# Altium PCB Supply Lines.PcbDoc (part 2 of 3)
Units mil, origin at the board's own origin, x right, y up, seen from the top; angles counter-clockwise.
Board outline 2300 x 4000 mil, 4 copper layers (Top Layer 1, GND, PWR, Bottom Layer 1), stack 23.712 mil thick; 27 components, 16 nets, 73 pads, 20 vias.
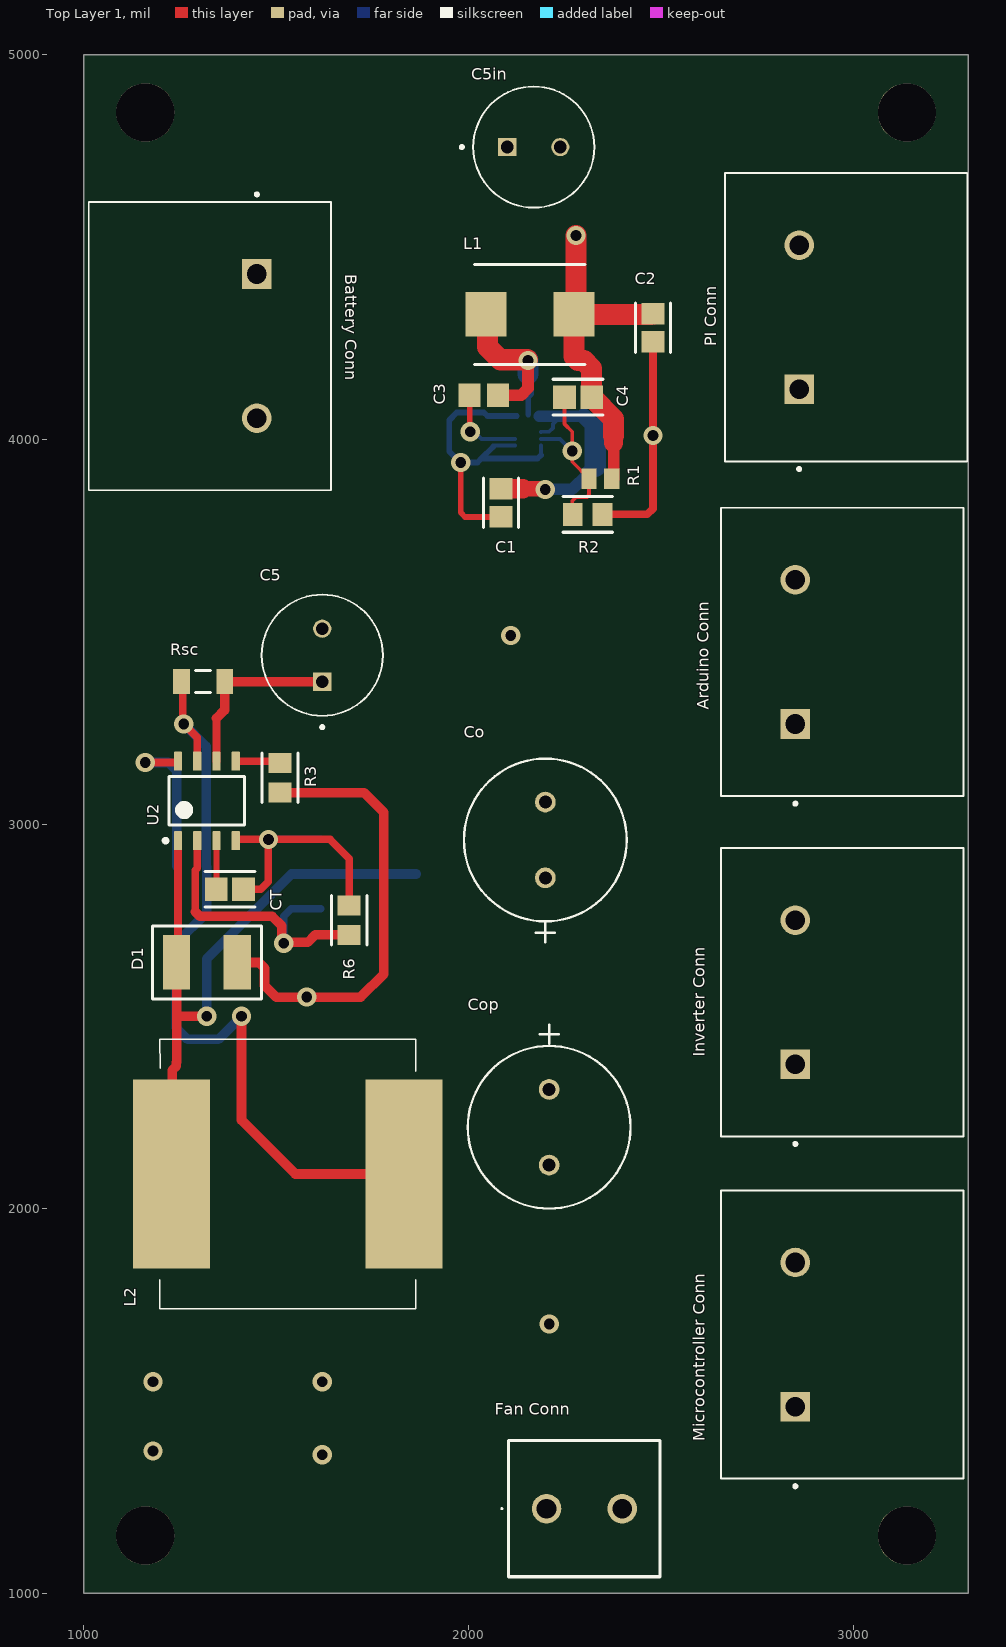
[diagram p0: Top Layer 1 view]

## Part data (continued)
L2: library part PA4344.823ANLT, "Inductor Power Shielded/Molded Wirewound 82uH 20% 100KHz 6.5A 0.083Ohm DCR T/R", DC Resistance (DCR)=83mΩ, Manufacturer="Pulse Electronics", Max Current Rating=6.5A, Max Operating Temperature=155°C, Min Operating Temperature=-55°C, Supplier Part Number=673-PA4344.823ANLT, Test Frequency=100kHz, Tolerance=20%, Category="Fixed Inductors", ComponentLink1Description=https://datasheet.octopart.com:443/PA4344.823ANLT-Pulse-datasheet-151605165.pdf?src-supplier=IHS, ComponentLink1URL=https://datasheet.octopart.com:443/PA4344.823ANLT-Pulse-datasheet-151605165.pdf?src-supplier=IHS, ComponentLink2Description=https://datasheet.octopart.com:443/PA4344.823ANLT-Pulse-datasheet-165545885.pdf?src-supplier=JRH+Electronics, ComponentLink2URL=https://datasheet.octopart.com:443/PA4344.823ANLT-Pulse-datasheet-165545885.pdf?src-supplier=JRH+Electronics, ComponentLink3Description=https://datasheet.octopart.com:443/PA4344.823ANLT-Pulse-Electronics-datasheet-184973453.pdf?src-supplier=Master+Electronics, ComponentLink3URL=https://datasheet.octopart.com:443/PA4344.823ANLT-Pulse-Electronics-datasheet-184973453.pdf?src-supplier=Master+Electronics, ComponentLink4Description=https://datasheet.octopart.com:443/PA4344.823ANLT-Pulse-datasheet-118084069.pdf?src-supplier=Sager+Electronics, ComponentLink4URL=https://datasheet.octopart.com:443/PA4344.823ANLT-Pulse-datasheet-118084069.pdf?src-supplier=Sager+Electronics, ComponentLink5Description=https://datasheet.octopart.com:443/PA4344.823ANLT-Pulse-datasheet-156002114.pdf?src-supplier=Future+Electronics, ComponentLink5URL=https://datasheet.octopart.com:443/PA4344.823ANLT-Pulse-datasheet-156002114.pdf?src-supplier=Future+Electronics, Country of Origin="Mainland China", Export Control Classification Number (ECCN) Code=EAR99, Harmonized Tariff Schedule (HTS) Code=8504.50.80.00, Height=6.7mm, Introduction Date=2017-09-08, Lifecycle Status=Production, Manufacturer Part Number=PA4344.823ANLT, Number of Circuits=1, Number of Terminals=2, Pricing="1=3.66, 10=3.01, 50=2.94, 100=2.34, 1000=2.27, 10000=2.27 (USD)", REACH SVHC=Yes, RoHS=Compliant, Shielding=Shielded, Stock=1073, Supplier=Mouser, Width=16.9mm
Q1: "60V 800mW 120@1A, 2V 6A NPN SOT-223 Bipolar Transistors - BJT ROHS", Case/Package=SOT-223-4, Collector Base Voltage (VCBO)=100V, Collector Emitter Breakdown Voltage=60V, Manufacturer=onsemi, Manufacturer Lifecycle Status=ACTIVE, Max Collector Current=6A, Max Operating Temperature=150°C, Max Power Dissipation=2W, Min Operating Temperature=-55°C, Supplier Part Number=863-NSV60601MZ4T3G, Transition Frequency=100MHz, Category=BJTs, China RoHS=Non-Compliant, Collector Emitter Voltage (VCEO)=60V, ComponentLink1Description=https://datasheet.octopart.com:443/NSV60601MZ4T3G-onsemi-datasheet-180967378.pdf?src-supplier=IHS, ComponentLink1URL=https://datasheet.octopart.com:443/NSV60601MZ4T3G-onsemi-datasheet-180967378.pdf?src-supplier=IHS, ComponentLink2Description=https://datasheet.octopart.com:443/NSV60601MZ4T3G-ON-Semiconductor-datasheet-12533590.pdf?src-supplier=Upverter, ComponentLink2URL=https://datasheet.octopart.com:443/NSV60601MZ4T3G-ON-Semiconductor-datasheet-12533590.pdf?src-supplier=Upverter, ComponentLink3Description=https://datasheet.octopart.com:443/NSV60601MZ4T3G-ON-Semiconductor-datasheet-606849.pdf?src-supplier=Upverter, ComponentLink3URL=https://datasheet.octopart.com:443/NSV60601MZ4T3G-ON-Semiconductor-datasheet-606849.pdf?src-supplier=Upverter, ComponentLink4Description=https://datasheet.octopart.com:443/NSV60601MZ4T3G-ON-Semiconductor-datasheet-21211183.pdf?src-supplier=Master+Electronics, ComponentLink4URL=https://datasheet.octopart.com:443/NSV60601MZ4T3G-ON-Semiconductor-datasheet-21211183.pdf?src-supplier=Master+Electronics, ComponentLink5Description=https://datasheet.octopart.com:443/NSV60601MZ4T3G-ON-Semiconductor-datasheet-11789331.pdf?src-supplier=Arrow+Electronics, ComponentLink5URL=https://datasheet.octopart.com:443/NSV60601MZ4T3G-ON-Semiconductor-datasheet-11789331.pdf?src-supplier=Arrow+Electronics, ComponentLink6Description=http://sigma.octopart.com:80/15540786/rohs_certificate/ON-Semiconductor-NSV60601MZ4T3G.pdf?src-supplier=Compliance+Statements, ComponentLink6URL=http://sigma.octopart.com:80/15540786/rohs_certificate/ON-Semiconductor-NSV60601MZ4T3G.pdf?src-supplier=Compliance+Statements, ComponentLink7Description=http://sigma.octopart.com:80/15684142/materials_sheet/ON-Semiconductor-NSV60601MZ4T3G.csv?src-supplier=Compliance+Statements, ComponentLink7URL=http://sigma.octopart.com:80/15684142/materials_sheet/ON-Semiconductor-NSV60601MZ4T3G.csv?src-supplier=Compliance+Statements, ComponentLink8Description=http://sigma.octopart.com:80/150628244/rohs_statement/ON-Semiconductor-NSV60601MZ4T3G.pdf?src-supplier=Compliance+Statements, ComponentLink8URL=http://sigma.octopart.com:80/150628244/rohs_statement/ON-Semiconductor-NSV60601MZ4T3G.pdf?src-supplier=Compliance+Statements, ComponentLink9Description=http://sigma.octopart.com:80/reach_statement/ON-Semiconductor-company-79.pdf?src-supplier=Compliance+Statements, ComponentLink9URL=http://sigma.octopart.com:80/reach_statement/ON-Semiconductor-company-79.pdf?src-supplier=Compliance+Statements, ComponentLink10Description=https://octopart.com:443/opatz8j6/c1?t=Fq9RzD1z76oITuJnUUIIje9FnkMVw7ujGmtvxlL00zEvNMuOTriP7ey4Z3fRDYHD9Ctmb2fFYDrQaTM328HbVSlQMdsz6cadFcpeZ3i-y4W-8NNzytqH1aDcYoJZxSLKkuhNMq89DChMVVbIPDo3_9CKO0jwaYgtXJ2tr_4Ac0NiaTg-0nbrA8WXrwmEPPzNMpnToj5WBXCY927xqXj6u9aDy6C97GxIEVr9rPPowPeLQdmU012F5EopcAhi18yvGvo97zShD_va5H4ofGkJIYYZwQ54_et4WUoF8BvkpBQpihA89mEv272vegbmvhlz6zCyIE0Zs8UG_eGBnLWEM_DH1msLZlWc-DnRoDw36JidmA&src-supplier=Compliance+Statements, ComponentLink10URL=https://octopart.com:443/opatz8j6/c1?t=Fq9RzD1z76oITuJnUUIIje9FnkMVw7ujGmtvxlL00zEvNMuOTriP7ey4Z3fRDYHD9Ctmb2fFYDrQaTM328HbVSlQMdsz6cadFcpeZ3i-y4W-8NNzytqH1aDcYoJZxSLKkuhNMq89DChMVVbIPDo3_9CKO0jwaYgtXJ2tr_4Ac0NiaTg-0nbrA8WXrwmEPPzNMpnToj5WBXCY927xqXj6u9aDy6C97GxIEVr9rPPowPeLQdmU012F5EopcAhi18yvGvo97zShD_va5H4ofGkJIYYZwQ54_et4WUoF8BvkpBQpihA89mEv272vegbmvhlz6zCyIE0Zs8UG_eGBnLWEM_DH1msLZlWc-DnRoDw36JidmA&src-supplier=Compliance+Statements, ComponentLink11Description=https://octopart.com:443/opatz8j6/c1?t=tsQCiBBqWjRv9H8_qbVEh58QX2dyIyjSx_cb_gShZ_LdjRhCJs2v19vJ3hL_KsOOYdLsEBJYel_52N-cvg8Nzchwl-Vd808wzW76ClgUy7p7O7OrMqJgWE9jlp_z7LQvFoUP7UyMrYrQG4La1ByiYJ6EqOVy0piM5QlrfCjZhxQkqVLmIZ55MdyQ9G7T5qS0aXRldBDlea3nPYCTSrbUz_3IkUli_7v4SpOJX9E9w3x3bcf4MS5otDIfWZsdEsyNPX7iWCy7wP_q6j1AoCZFXN9d-Ms9tvnyBheX3UlYZTBXdEAQ2qSpJyKZlEuTOQRh73pTUHv4FAck1aaFrOxKMKoUbyEzp1lIlMLsYkCyxUN0&src-supplier=Compliance+Statements, ComponentLink11URL=https://octopart.com:443/opatz8j6/c1?t=tsQCiBBqWjRv9H8_qbVEh58QX2dyIyjSx_cb_gShZ_LdjRhCJs2v19vJ3hL_KsOOYdLsEBJYel_52N-cvg8Nzchwl-Vd808wzW76ClgUy7p7O7OrMqJgWE9jlp_z7LQvFoUP7UyMrYrQG4La1ByiYJ6EqOVy0piM5QlrfCjZhxQkqVLmIZ55MdyQ9G7T5qS0aXRldBDlea3nPYCTSrbUz_3IkUli_7v4SpOJX9E9w3x3bcf4MS5otDIfWZsdEsyNPX7iWCy7wP_q6j1AoCZFXN9d-Ms9tvnyBheX3UlYZTBXdEAQ2qSpJyKZlEuTOQRh73pTUHv4FAck1aaFrOxKMKoUbyEzp1lIlMLsYkCyxUN0&src-supplier=Compliance+Statements, Country of Origin=Malaysia, Export Control Classification Number (ECCN) Code=EAR99, Halogen Free="Halogen Free", hFE Min=50, Introduction Date=2007-09-19, Lead Free="Lead Free", Lifecycle Status=Production, Manufacturer Part Number=NSV60601MZ4T3G, Number of Elements=1, Number of Terminals=4, Packaging="Tape and Reel", Pins=4, Polarity=NPN, Pricing="1=0.99, 10=0.619, 50=0.619, 100=0.403, 1000=0.281, 10000=0.24 (USD)", Radiation Hardening=No, REACH SVHC=No, RoHS=Compliant, Schedule B="8541290080, 8541290080|8541290080|8541290080|8541290080|8541290080", Stock=4495, Supplier=Mouser
R1: library part ERA6AEB164V, "Res Thin Film 0805 160K Ohm 0.1% 0.125W ±25ppm/°C Molded SMD Punched Carrier T/R", Case Code (Imperial)=0805, Manufacturer=Panasonic, Manufacturer Lifecycle Status=ACTIVE, Max Operating Temperature=155°C, Max Power Dissipation=125mW, Min Operating Temperature=-55°C, Supplier Part Number=667-ERA-6AEB164V, Temperature Coefficient=25ppm/°C, Tolerance=0.1%, Voltage Rating=100V, Case/Package=0805, Category="Chip SMD Resistors", China RoHS=Non-Compliant, ComponentLink1Description=https://datasheet.octopart.com:443/ERA6AEB164V-Panasonic-datasheet-181959660.pdf?src-supplier=IHS, ComponentLink1URL=https://datasheet.octopart.com:443/ERA6AEB164V-Panasonic-datasheet-181959660.pdf?src-supplier=IHS, ComponentLink2Description=https://datasheet.octopart.com/ERA6AEB164V-Panasonic-datasheet-62287448.pdf, ComponentLink2URL=https://datasheet.octopart.com/ERA6AEB164V-Panasonic-datasheet-62287448.pdf, ComponentLink3Description=https://datasheet.octopart.com/ERA6AEB164V-Panasonic-datasheet-78375410.pdf, ComponentLink3URL=https://datasheet.octopart.com/ERA6AEB164V-Panasonic-datasheet-78375410.pdf, ComponentLink4Description=https://datasheet.octopart.com:443/ERA6AEB164V-Panasonic-datasheet-136531316.pdf?src-supplier=Newark, ComponentLink4URL=https://datasheet.octopart.com:443/ERA6AEB164V-Panasonic-datasheet-136531316.pdf?src-supplier=Newark, ComponentLink5Description=https://datasheet.octopart.com:443/ERA6AEB164V-Panasonic-datasheet-8367715.pdf?src-supplier=Newark, ComponentLink5URL=https://datasheet.octopart.com:443/ERA6AEB164V-Panasonic-datasheet-8367715.pdf?src-supplier=Newark, ComponentLink6Description=https://datasheet.octopart.com:443/ERA-6AEB164V-Panasonic-datasheet-154766165.pdf?src-supplier=JRH+Electronics, ComponentLink6URL=https://datasheet.octopart.com:443/ERA-6AEB164V-Panasonic-datasheet-154766165.pdf?src-supplier=JRH+Electronics, ComponentLink7Description=https://datasheet.octopart.com:443/ERA-6AEB164V-Panasonic-datasheet-118567.pdf?src-supplier=element14, ComponentLink7URL=https://datasheet.octopart.com:443/ERA-6AEB164V-Panasonic-datasheet-118567.pdf?src-supplier=element14, ComponentLink8Description=https://datasheet.octopart.com:443/ERA6AEB164V-Panasonic-datasheet-61114971.pdf?src-supplier=element14+APAC, ComponentLink8URL=https://datasheet.octopart.com:443/ERA6AEB164V-Panasonic-datasheet-61114971.pdf?src-supplier=element14+APAC, ComponentLink9Description=https://datasheet.octopart.com:443/ERA6AEB164V-Panasonic-datasheet-188913046.pdf?src-supplier=TME, ComponentLink9URL=https://datasheet.octopart.com:443/ERA6AEB164V-Panasonic-datasheet-188913046.pdf?src-supplier=TME, ComponentLink10Description=https://sigma.octopart.com:443/150570796/technical_drawing/Panasonic-ERA6AEB164V.pdf?src-supplier=Panasonic+SCT, ComponentLink10URL=https://sigma.octopart.com:443/150570796/technical_drawing/Panasonic-ERA6AEB164V.pdf?src-supplier=Panasonic+SCT, ComponentLink11Description=https://datasheet.octopart.com:443/ERA6AEB164V-Panasonic-datasheet-138783076.pdf?src-supplier=Burklin+Elektronik, ComponentLink11URL=https://datasheet.octopart.com:443/ERA6AEB164V-Panasonic-datasheet-138783076.pdf?src-supplier=Burklin+Elektronik, ComponentLink12Description=https://datasheet.octopart.com:443/ERA6AEB164V-Panasonic---ECG-datasheet-15994758.pdf?src-supplier=Farnell, ComponentLink12URL=https://datasheet.octopart.com:443/ERA6AEB164V-Panasonic---ECG-datasheet-15994758.pdf?src-supplier=Farnell, ComponentLink13Description=https://datasheet.octopart.com:443/ERA-6AEB164V-Panasonic-datasheet-13266200.pdf?src-supplier=Electro+Sonic, ComponentLink13URL=https://datasheet.octopart.com:443/ERA-6AEB164V-Panasonic-datasheet-13266200.pdf?src-supplier=Electro+Sonic, ComponentLink14Description=https://datasheet.octopart.com:443/ERA-6AEB164V-Panasonic-datasheet-33006989.pdf?src-supplier=Electro+Sonic, ComponentLink14URL=https://datasheet.octopart.com:443/ERA-6AEB164V-Panasonic-datasheet-33006989.pdf?src-supplier=Electro+Sonic, ComponentLink15Description=https://datasheet.octopart.com:443/ERA-6AEB164V-Panasonic-datasheet-46744048.pdf?src-supplier=Electro+Sonic, ComponentLink15URL=https://datasheet.octopart.com:443/ERA-6AEB164V-Panasonic-datasheet-46744048.pdf?src-supplier=Electro+Sonic, Composition="Thin Film", Contact Plating=Tin, Depth=1.25mm, Features="Automotive AEC-Q200", Height=500µm, Lead Free="Lead Free", Length=2mm, Lifecycle Status=Production, Manufacturer Part Number=ERA6AEB164V, Military Standard=Not, Mounting Technology="Surface Mount", Number of Terminals=2, Number of Terminations=2, Packaging="Cut Tape", Part Series="Thin Film Chip Resistors, High Reliability Type", Pins=2, Power Dissipation=125mW, Power Rating=125mW, Pricing="1=0.1, 10=0.054, 50=0.054, 100=0.051, 1000=0.042, 10000=0.035 (USD)", Radiation Hardening=No, REACH SVHC=Yes, RoHS=Compliant, Schedule B="8533210045, 8533210045|8533210045|8533210045|8533210045|8533210045", Stock=9105, Supplier=Mouser, Termination=SMD/SMT, Voltage Rating (DC)=100V, Weight=5.499807mg, Width=1.25mm, Working Voltage=100V
R2: library part CRG0805F30K, "Res Thick Film 0805 30K Ohm 1% 0.125W(1/8W) ±100ppm/C Pad SMD T/R", Case Code (Imperial)=0805, Case Code (Metric)=2012, Manufacturer="TE Connectivity", Manufacturer Lifecycle Status=ACTIVE, Max Operating Temperature=155°C, Max Power Dissipation=125mW, Min Operating Temperature=-55°C, Number of Resistors=1, Operating Supply Voltage=150V, Supplier Part Number=279-CRG0805F30K, Temperature Coefficient=100ppm/°C, Tolerance=1%, Case/Package=0805, Category="Chip SMD Resistors", China RoHS=Non-Compliant, ComponentLink1Description=https://datasheet.octopart.com:443/CRG0805F30K-TE-Connectivity-datasheet-167977698.pdf?src-supplier=Future+Electronics, ComponentLink1URL=https://datasheet.octopart.com:443/CRG0805F30K-TE-Connectivity-datasheet-167977698.pdf?src-supplier=Future+Electronics, ComponentLink2Description=https://datasheet.octopart.com:443/CRG0805F30K-TE-Connectivity-datasheet-44624597.pdf?src-supplier=Farnell, ComponentLink2URL=https://datasheet.octopart.com:443/CRG0805F30K-TE-Connectivity-datasheet-44624597.pdf?src-supplier=Farnell, ComponentLink3Description=https://datasheet.octopart.com:443/CRG0805F30K-TE-Connectivity-datasheet-11120284.pdf?src-supplier=Farnell, ComponentLink3URL=https://datasheet.octopart.com:443/CRG0805F30K-TE-Connectivity-datasheet-11120284.pdf?src-supplier=Farnell, ComponentLink4Description=https://datasheet.octopart.com:443/CRG0805F30K-TE-Connectivity-datasheet-128558484.pdf?src-supplier=Master+Electronics, ComponentLink4URL=https://datasheet.octopart.com:443/CRG0805F30K-TE-Connectivity-datasheet-128558484.pdf?src-supplier=Master+Electronics, ComponentLink5Description=https://datasheet.octopart.com:443/1623191-1-TE-Connectivity---AMP-datasheet-189108518.pdf?src-supplier=Master+Electronics, ComponentLink5URL=https://datasheet.octopart.com:443/1623191-1-TE-Connectivity---AMP-datasheet-189108518.pdf?src-supplier=Master+Electronics, ComponentLink6Description=https://datasheet.octopart.com:443/CRG0805F30K-Tyco-Electronics-datasheet-11120141.pdf?src-supplier=TE+Connectivity, ComponentLink6URL=https://datasheet.octopart.com:443/CRG0805F30K-Tyco-Electronics-datasheet-11120141.pdf?src-supplier=TE+Connectivity, ComponentLink7Description=https://sigma.octopart.com:443/14528497/technical_drawing/TE-Connectivity-CRG0805F30K.pdf?src-supplier=Sager+Electronics, ComponentLink7URL=https://sigma.octopart.com:443/14528497/technical_drawing/TE-Connectivity-CRG0805F30K.pdf?src-supplier=Sager+Electronics, ComponentLink8Description=https://datasheet.octopart.com:443/CRG0805F30K-TE-Connectivity-datasheet-137111068.pdf?src-supplier=X-ON, ComponentLink8URL=https://datasheet.octopart.com:443/CRG0805F30K-TE-Connectivity-datasheet-137111068.pdf?src-supplier=X-ON, ComponentLink9Description=http://sigma.octopart.com:80/14528496/rohs_certificate/TE-Connectivity-CRG0805F30K.pdf?src-supplier=Compliance+Statements, ComponentLink9URL=http://sigma.octopart.com:80/14528496/rohs_certificate/TE-Connectivity-CRG0805F30K.pdf?src-supplier=Compliance+Statements, Composition="Thick Film", Depth=1.25mm, ELV=Compliant, Export Control Classification Number (ECCN) Code=EAR99, Harmonized Tariff Schedule (HTS) Code=8533.21.00.30, Height=550µm, Introduction Date=2009-09-24, Length=2mm, Lifecycle Status=Production, Manufacturer Part Number=CRG0805F30K, Military Standard=Not, Mounting Technology="Surface Mount", Number of Terminals=2, Number of Terminations=2, Packaging="Tape & Reel (TR)", Power Dissipation=125mW, Power Rating=125mW, Pricing="1=0.1, 10=0.023, 50=0.023, 100=0.019, 1000=0.011, 10000=0.006 (USD)", Radiation Hardening=No, REACH SVHC=Yes, RoHS=Compliant, Stock=24302, Supplier=Mouser, Termination=Solder, Voltage Rating=150V, Weight=5.499807mg, Width=1.25mm, Working Voltage=150V
R3: library part CRG0805F1K2, "Fixed Resistor, Thick Film, 0.125W, 1200ohm, 150V, 1% +/-Tol, 100ppm/Cel, Surface Mount, 0805", Case Code (Imperial)=0805, Case Code (Metric)=2012, Manufacturer="TE Connectivity", Manufacturer Lifecycle Status=ACTIVE, Max Operating Temperature=125°C, Max Power Dissipation=125mW, Min Operating Temperature=-55°C, Number of Resistors=1, Operating Supply Voltage=150V, Supplier Part Number=279-CRG0805F1K2, Temperature Coefficient=100ppm/°C, Tolerance=1%, Case/Package=0805, Category="Chip SMD Resistors", China RoHS=Non-Compliant, ComponentLink1Description=https://datasheet.octopart.com:443/CRG0805F1K2-TE-Connectivity-datasheet-167977698.pdf?src-supplier=IHS, ComponentLink1URL=https://datasheet.octopart.com:443/CRG0805F1K2-TE-Connectivity-datasheet-167977698.pdf?src-supplier=IHS, ComponentLink2Description=https://datasheet.octopart.com:443/CRG0805F1K2-TE-Connectivity-datasheet-182172479.pdf?src-supplier=IHS, ComponentLink2URL=https://datasheet.octopart.com:443/CRG0805F1K2-TE-Connectivity-datasheet-182172479.pdf?src-supplier=IHS, ComponentLink3Description=https://datasheet.octopart.com:443/CRG0805F1K2-TE-Connectivity-datasheet-11120284.pdf?src-supplier=Farnell, ComponentLink3URL=https://datasheet.octopart.com:443/CRG0805F1K2-TE-Connectivity-datasheet-11120284.pdf?src-supplier=Farnell, ComponentLink4Description=https://datasheet.octopart.com:443/CRG0805F1K2-TE-Connectivity-datasheet-44624597.pdf?src-supplier=Farnell, ComponentLink4URL=https://datasheet.octopart.com:443/CRG0805F1K2-TE-Connectivity-datasheet-44624597.pdf?src-supplier=Farnell, ComponentLink5Description=https://datasheet.octopart.com:443/CRG0805F1K2-TE-Connectivity-datasheet-128558484.pdf?src-supplier=Master+Electronics, ComponentLink5URL=https://datasheet.octopart.com:443/CRG0805F1K2-TE-Connectivity-datasheet-128558484.pdf?src-supplier=Master+Electronics, ComponentLink6Description=https://datasheet.octopart.com:443/1623133-1-TE-Connectivity---AMP-datasheet-189108518.pdf?src-supplier=Master+Electronics, ComponentLink6URL=https://datasheet.octopart.com:443/1623133-1-TE-Connectivity---AMP-datasheet-189108518.pdf?src-supplier=Master+Electronics, ComponentLink7Description=https://datasheet.octopart.com:443/CRG0805F1K2-Tyco-Electronics-datasheet-11120141.pdf?src-supplier=Electro+Sonic, ComponentLink7URL=https://datasheet.octopart.com:443/CRG0805F1K2-Tyco-Electronics-datasheet-11120141.pdf?src-supplier=Electro+Sonic, ComponentLink8Description=https://sigma.octopart.com:443/14530244/technical_drawing/TE-Connectivity-CRG0805F1K2.pdf?src-supplier=Sager+Electronics, ComponentLink8URL=https://sigma.octopart.com:443/14530244/technical_drawing/TE-Connectivity-CRG0805F1K2.pdf?src-supplier=Sager+Electronics, ComponentLink9Description=https://datasheet.octopart.com:443/CRG0805F1K2-TE-Connectivity-datasheet-137111056.pdf?src-supplier=X-ON, ComponentLink9URL=https://datasheet.octopart.com:443/CRG0805F1K2-TE-Connectivity-datasheet-137111056.pdf?src-supplier=X-ON, ComponentLink10Description=https://datasheet.octopart.com:443/CRG0805F1K2-TE-Connectivity-datasheet-111046813.pdf?src-supplier=RS+(Formerly+Allied+Electronics), ComponentLink10URL=https://datasheet.octopart.com:443/CRG0805F1K2-TE-Connectivity-datasheet-111046813.pdf?src-supplier=RS+(Formerly+Allied+Electronics), ComponentLink11Description=https://datasheet.octopart.com:443/CRG0805F1K2-TE-Connectivity-datasheet-20739855.pdf?src-supplier=RS+(Formerly+Allied+Electronics), ComponentLink11URL=https://datasheet.octopart.com:443/CRG0805F1K2-TE-Connectivity-datasheet-20739855.pdf?src-supplier=RS+(Formerly+Allied+Electronics), ComponentLink12Description=https://datasheet.octopart.com:443/CRG0805F1K2-Tyco-Electronics-datasheet-9755276.pdf?src-supplier=RS+(Formerly+Allied+Electronics), ComponentLink12URL=https://datasheet.octopart.com:443/CRG0805F1K2-Tyco-Electronics-datasheet-9755276.pdf?src-supplier=RS+(Formerly+Allied+Electronics), ComponentLink13Description=http://sigma.octopart.com:80/14530243/rohs_certificate/TE-Connectivity-CRG0805F1K2.pdf?src-supplier=Compliance+Statements, ComponentLink13URL=http://sigma.octopart.com:80/14530243/rohs_certificate/TE-Connectivity-CRG0805F1K2.pdf?src-supplier=Compliance+Statements, ComponentLink14Description=http://sigma.octopart.com:80/62063384/materials_sheet/TE-Connectivity-CRG0805F1K2.pdf?src-supplier=Compliance+Statements, ComponentLink14URL=http://sigma.octopart.com:80/62063384/materials_sheet/TE-Connectivity-CRG0805F1K2.pdf?src-supplier=Compliance+Statements, Composition="Thick Film", Depth=1.25mm, ELV=Compliant, Export Control Classification Number (ECCN) Code=EAR99, Harmonized Tariff Schedule (HTS) Code=8533.21.00.30, Height=550µm, Introduction Date=2003-09-18, Length=2mm, Lifecycle Status=Production, Manufacturer Part Number=CRG0805F1K2, Military Standard=Not, Mounting Technology="Surface Mount", Number of Terminals=2, Number of Terminations=2, Packaging="Tape & Reel (TR)", Power Dissipation=125mW, Power Rating=125mW, Pricing="1=0.1, 10=0.022, 50=0.022, 100=0.018, 1000=0.011, 10000=0.006 (USD)", Radiation Hardening=No, REACH SVHC=Yes, RoHS=Compliant, Stock=124570, Supplier=Mouser, Termination=Solder, Voltage Rating=150V, Width=1.25mm, Working Voltage=150V
R5: library part RMCF0805JT180R, "Res Thick Film 0805 180 Ohm 5% 0.125W(1/8W) ±200ppm/C Pad SMD Automotive T/R", Case Code (Imperial)=0805, Case Code (Metric)=2012, Manufacturer="Stackpole Electronics", Max Operating Temperature=155°C, Max Power Dissipation=125mW, Min Operating Temperature=-55°C, Supplier Part Number=708-RMCF0805JT180R, Temperature Coefficient=100ppm/°C, Tolerance=5%, Voltage Rating=150V, Case/Package=0805, Category="Chip SMD Resistors", China RoHS=Non-Compliant, ComponentLink1Description=https://datasheet.octopart.com:443/RMCF0805JT180R-Stackpole-Electronics-datasheet-182148065.pdf?src-supplier=IHS, ComponentLink1URL=https://datasheet.octopart.com:443/RMCF0805JT180R-Stackpole-Electronics-datasheet-182148065.pdf?src-supplier=IHS, ComponentLink2Description=https://datasheet.octopart.com:443/RMCF0805JT180R-Stackpole-Electronics-datasheet-28504820.pdf?src-supplier=Upverter, ComponentLink2URL=https://datasheet.octopart.com:443/RMCF0805JT180R-Stackpole-Electronics-datasheet-28504820.pdf?src-supplier=Upverter, ComponentLink3Description=https://datasheet.octopart.com:443/RMCF0805JT180R-Stackpole-Electronics-datasheet-141193804.pdf?src-supplier=Master+Electronics, ComponentLink3URL=https://datasheet.octopart.com:443/RMCF0805JT180R-Stackpole-Electronics-datasheet-141193804.pdf?src-supplier=Master+Electronics, ComponentLink4Description=https://datasheet.octopart.com:443/RMCF0805JT180R-Stackpole-Electronics-datasheet-189104163.pdf?src-supplier=Master+Electronics, ComponentLink4URL=https://datasheet.octopart.com:443/RMCF0805JT180R-Stackpole-Electronics-datasheet-189104163.pdf?src-supplier=Master+Electronics, ComponentLink5Description=https://datasheet.octopart.com:443/RMCF0805JT180R-Stackpole-Electronics-datasheet-116606903.pdf?src-supplier=Master+Electronics, ComponentLink5URL=https://datasheet.octopart.com:443/RMCF0805JT180R-Stackpole-Electronics-datasheet-116606903.pdf?src-supplier=Master+Electronics, ComponentLink6Description=https://datasheet.octopart.com:443/RMCF0805JT180R-Stackpole-Electronics-datasheet-12534581.pdf?src-supplier=Future+Electronics, ComponentLink6URL=https://datasheet.octopart.com:443/RMCF0805JT180R-Stackpole-Electronics-datasheet-12534581.pdf?src-supplier=Future+Electronics, ComponentLink7Description=https://datasheet.octopart.com:443/RMCF0805JT180R-Stackpole-Electronics-datasheet-12510902.pdf?src-supplier=Future+Electronics, ComponentLink7URL=https://datasheet.octopart.com:443/RMCF0805JT180R-Stackpole-Electronics-datasheet-12510902.pdf?src-supplier=Future+Electronics, ComponentLink8Description=https://datasheet.octopart.com:443/RMCF0805JT180R-Stackpole-Electronics-datasheet-62091608.pdf?src-supplier=Stackpole+Electronics, ComponentLink8URL=https://datasheet.octopart.com:443/RMCF0805JT180R-Stackpole-Electronics-datasheet-62091608.pdf?src-supplier=Stackpole+Electronics, ComponentLink9Description=https://datasheet.octopart.com:443/RMCF0805JT180R-Stackpole-Electronics-datasheet-10788263.pdf?src-supplier=Stackpole+Electronics, ComponentLink9URL=https://datasheet.octopart.com:443/RMCF0805JT180R-Stackpole-Electronics-datasheet-10788263.pdf?src-supplier=Stackpole+Electronics, ComponentLink10Description=http://sigma.octopart.com:80/15940719/materials_sheet/Stackpole-Electronics-RMCF0805JT180R.pdf?src-supplier=Compliance+Statements, ComponentLink10URL=http://sigma.octopart.com:80/15940719/materials_sheet/Stackpole-Electronics-RMCF0805JT180R.pdf?src-supplier=Compliance+Statements, ComponentLink11Description=http://sigma.octopart.com:80/141158212/rohs_statement/Stackpole-Electronics-RMCF0805JT180R.pdf?src-supplier=Compliance+Statements, ComponentLink11URL=http://sigma.octopart.com:80/141158212/rohs_statement/Stackpole-Electronics-RMCF0805JT180R.pdf?src-supplier=Compliance+Statements, ComponentLink12Description=http://sigma.octopart.com:80/141158211/reach_statement/Stackpole-Electronics-RMCF0805JT180R.pdf?src-supplier=Compliance+Statements, ComponentLink12URL=http://sigma.octopart.com:80/141158211/reach_statement/Stackpole-Electronics-RMCF0805JT180R.pdf?src-supplier=Compliance+Statements, Composition="Thick Film", Contact Plating=Tin, Country of Origin="Japan, Mainland China, Taiwan", Depth=1.25mm, Export Control Classification Number (ECCN) Code=EAR99, Features="Automotive AEC-Q200", Harmonized Tariff Schedule (HTS) Code=8533.21.00.30, Height=500µm, Introduction Date=2011-01-07, Lead Free="Lead Free", Length=2.0066mm, Lifecycle Status=Production, Manufacturer Part Number=RMCF0805JT180R, Military Standard=Not, Mounting Technology="Surface Mount", Number of Terminals=2, Number of Terminations=2, Packaging=Digi-Reel®, Power Dissipation=125mW, Power Rating=125mW, Pricing="1=0.1, 10=0.007, 50=0.007, 100=0.006, 1000=0.006, 10000=0.002 (USD)", Radiation Hardening=No, REACH SVHC=Yes, RoHS=Compliant, Schedule B="8533210045, 8533210045|8533210045, 8533210045|8533210045|8533210045, 8533210045|8533210045|8533210045|8533210045", Stock=102621, Supplier=Mouser, Width=1.25mm, Working Voltage=150V
R6: library part CRGCQ0805J10K, "Res Thick Film 0805 10K Ohm 5% 0.125W(1/8W) ±100ppm/C Pad SMD Automotive T/R", Ambient Temperature Range High=70°C, Manufacturer="TE Connectivity", Manufacturer Lifecycle Status=ACTIVE, Max Operating Temperature=155°C, Min Operating Temperature=-55°C, Operating Supply Voltage=150V, Power Dissipation=125mW, Supplier Part Number=A130140CT-ND, Temperature Coefficient=100ppm/°C, Tolerance=5%, Category="Chip SMD Resistors", China RoHS=Non-Compliant, ComponentLink1Description=https://datasheet.octopart.com:443/CRGCQ0805J10K-TE-Connectivity-datasheet-114679081.pdf?src-supplier=Master+Electronics, ComponentLink1URL=https://datasheet.octopart.com:443/CRGCQ0805J10K-TE-Connectivity-datasheet-114679081.pdf?src-supplier=Master+Electronics, ComponentLink2Description=https://datasheet.octopart.com:443/2-2176342-5-TE-Connectivity---AMP-datasheet-189108688.pdf?src-supplier=Master+Electronics, ComponentLink2URL=https://datasheet.octopart.com:443/2-2176342-5-TE-Connectivity---AMP-datasheet-189108688.pdf?src-supplier=Master+Electronics, ComponentLink3Description=https://datasheet.octopart.com:443/CRGCQ0805J10K-TE-Connectivity-datasheet-179161841.pdf?src-supplier=IHS, ComponentLink3URL=https://datasheet.octopart.com:443/CRGCQ0805J10K-TE-Connectivity-datasheet-179161841.pdf?src-supplier=IHS, ComponentLink4Description=https://sigma.octopart.com:443/114702769/technical_drawing/TE-Connectivity-CRGCQ0805J10K.pdf?src-supplier=Sager+Electronics, ComponentLink4URL=https://sigma.octopart.com:443/114702769/technical_drawing/TE-Connectivity-CRGCQ0805J10K.pdf?src-supplier=Sager+Electronics, Composition="Thick Film", Height=550µm, Lifecycle Status=Production, Manufacturer Part Number=CRGCQ0805J10K, Mounting Technology="Surface Mount", Number of Terminals=2, Packaging="Cut Tape", Power Rating=125mW, Pricing="1=0.1, 10=0.031, 25=0.0232, 50=0.0188, 100=0.0153, 250=0.01204, 500=0.01016, 1000=0.00868 (USD)", REACH SVHC=Yes, RoHS=Compliant, Schedule B="8533210025, 8533210025|8533210025|8533210025|8533210025|8533210025, 8533210045", Stock=448725, Supplier=DigiKey, Voltage Rating=150V, Voltage Rating (DC)=150V, Width=1.25mm, Working Voltage=150V
Rsc: library part ERJ-8BWFR068V, "Res Thick Film 1206 0.068 Ohm 1% 1W ±100ppm/°C Molded SMD SMD Punched Carrier T/R", Case Code (Imperial)=1206, Case Code (Metric)=3216, Manufacturer=Panasonic, Manufacturer Lifecycle Status=ACTIVE, Max Operating Temperature=155°C, Max Power Dissipation=1W, Min Operating Temperature=-55°C, Supplier Part Number=P.068AUCT-ND, Temperature Coefficient=100ppm/°C, Tolerance=1%, Working Voltage=260.8mV, Case/Package=1206, Category="Chip SMD Resistors", ComponentLink1Description=https://datasheet.octopart.com:443/ERJ-8BWFR068V-Panasonic-datasheet-68299093.pdf?src-supplier=Panasonic, ComponentLink1URL=https://datasheet.octopart.com:443/ERJ-8BWFR068V-Panasonic-datasheet-68299093.pdf?src-supplier=Panasonic, ComponentLink2Description=https://datasheet.octopart.com:443/ERJ-8BWFR068V-Panasonic-datasheet-119112.pdf?src-supplier=Newark, ComponentLink2URL=https://datasheet.octopart.com:443/ERJ-8BWFR068V-Panasonic-datasheet-119112.pdf?src-supplier=Newark, ComponentLink3Description=https://datasheet.octopart.com:443/ERJ-8BWFR068V-Panasonic-datasheet-159764274.pdf?src-supplier=Newark, ComponentLink3URL=https://datasheet.octopart.com:443/ERJ-8BWFR068V-Panasonic-datasheet-159764274.pdf?src-supplier=Newark, ComponentLink4Description=https://datasheet.octopart.com:443/ERJ-8BWFR068V-Panasonic-datasheet-41172793.pdf?src-supplier=Farnell, ComponentLink4URL=https://datasheet.octopart.com:443/ERJ-8BWFR068V-Panasonic-datasheet-41172793.pdf?src-supplier=Farnell, ComponentLink5Description=https://datasheet.octopart.com:443/ERJ8BWFR068V-Panasonic---ECG-datasheet-15994758.pdf?src-supplier=Farnell, ComponentLink5URL=https://datasheet.octopart.com:443/ERJ8BWFR068V-Panasonic---ECG-datasheet-15994758.pdf?src-supplier=Farnell, ComponentLink6Description=https://datasheet.octopart.com:443/ERJ-8BWFR068V-Panasonic-datasheet-154766170.pdf?src-supplier=Master+Electronics, ComponentLink6URL=https://datasheet.octopart.com:443/ERJ-8BWFR068V-Panasonic-datasheet-154766170.pdf?src-supplier=Master+Electronics, ComponentLink7Description=https://datasheet.octopart.com:443/ERJ8BWFR068V-Panasonic-datasheet-12469511.pdf?src-supplier=element14+APAC, ComponentLink7URL=https://datasheet.octopart.com:443/ERJ8BWFR068V-Panasonic-datasheet-12469511.pdf?src-supplier=element14+APAC, ComponentLink8Description=https://datasheet.octopart.com:443/ERJ-8BWFR068V-Panasonic-datasheet-13271236.pdf?src-supplier=RS+(Formerly+Allied+Electronics), ComponentLink8URL=https://datasheet.octopart.com:443/ERJ-8BWFR068V-Panasonic-datasheet-13271236.pdf?src-supplier=RS+(Formerly+Allied+Electronics), ComponentLink9Description=https://datasheet.octopart.com:443/ERJ8BWFR068V-Panasonic-datasheet-10176864.pdf?src-supplier=RS+(Formerly+Allied+Electronics), ComponentLink9URL=https://datasheet.octopart.com:443/ERJ8BWFR068V-Panasonic-datasheet-10176864.pdf?src-supplier=RS+(Formerly+Allied+Electronics), ComponentLink10Description=https://datasheet.octopart.com:443/ERJ8BWFR068V-Panasonic-datasheet-170667598.pdf?src-supplier=TME, ComponentLink10URL=https://datasheet.octopart.com:443/ERJ8BWFR068V-Panasonic-datasheet-170667598.pdf?src-supplier=TME, ComponentLink11Description=https://datasheet.octopart.com:443/ERJ8BWFR068V-Panasonic-datasheet-164871471.pdf?src-supplier=Burklin+Elektronik, ComponentLink11URL=https://datasheet.octopart.com:443/ERJ8BWFR068V-Panasonic-datasheet-164871471.pdf?src-supplier=Burklin+Elektronik, ComponentLink12Description=https://datasheet.octopart.com:443/ERJ-8BWFR068V-Panasonic-datasheet-62346600.pdf?src-supplier=Future+Electronics, ComponentLink12URL=https://datasheet.octopart.com:443/ERJ-8BWFR068V-Panasonic-datasheet-62346600.pdf?src-supplier=Future+Electronics, ComponentLink13Description=https://datasheet.octopart.com:443/ERJ-8BWFR068V-Panasonic-datasheet-62099257.pdf?src-supplier=Electro+Sonic, ComponentLink13URL=https://datasheet.octopart.com:443/ERJ-8BWFR068V-Panasonic-datasheet-62099257.pdf?src-supplier=Electro+Sonic, ComponentLink14Description=https://datasheet.octopart.com:443/ERJ-8BWFR068V-Panasonic-datasheet-22087634.pdf?src-supplier=Electro+Sonic, ComponentLink14URL=https://datasheet.octopart.com:443/ERJ-8BWFR068V-Panasonic-datasheet-22087634.pdf?src-supplier=Electro+Sonic, Composition="Thick Film", Contact Plating=Tin, Depth=1.6mm, Features="Automotive AEC-Q200", Height=650µm, Lead Free="Lead Free", Length=3.2mm, Lifecycle Status=Production, Manufacturer Part Number=ERJ-8BWFR068V, Military Standard=Not, Mounting Technology="Surface Mount", Number of Terminals=2, Number of Terminations=2, Packaging="Cut Tape", Part Series="Current Sensing Resistors Thick Film Type", Pins=2, Power Dissipation=1W, Power Rating=1W, Pricing="1=0.66, 10=0.393, 25=0.3332, 50=0.299, 100=0.2718, 250=0.24428, 500=0.22836, 1000=0.21569 (USD)", Radiation Hardening=No, REACH SVHC=Yes, RoHS=Compliant, Schedule B="8533210045, 8533210045|8533210045, 8533210045|8533210045|8533210045, 8533210045|8533210045|8533210045|8533210045", Stock=31382, Supplier=DigiKey, Termination=SMD/SMT, Width=1.6mm
U1: "DC-DC Switching Synchronous Buck Regulator, Adjustable, 3.8V-32V in, 0.8-31V/3.5A out, V-DFN3020-13", Manufacturer="Diodes Inc.", Max Operating Temperature=85°C, Max Output current=3.5A, Max Output Voltage=31V, Max Supply Voltage=32V, Max Switching Frequency=450kHz, Min Input Voltage=3.8V, Min Operating Temperature=-40°C, Min Output Voltage=800mV, Nominal Output Voltage=5V, Nominal Supply Voltage=12V, Supplier Part Number=621-AP63357DV-7, Category="Voltage Regulators - Switching", China RoHS=Compliant, ComponentLink1Description=https://datasheet.octopart.com:443/AP63357DV-7-Diodes-Inc.-datasheet-145012321.pdf?src-supplier=IHS, ComponentLink1URL=https://datasheet.octopart.com:443/AP63357DV-7-Diodes-Inc.-datasheet-145012321.pdf?src-supplier=IHS, ComponentLink2Description=https://sigma.octopart.com:443/151209837/technical_drawing/Diodes-Inc.-AP63357DV-7.pdf?src-supplier=Diodes+Inc+SCT, ComponentLink2URL=https://sigma.octopart.com:443/151209837/technical_drawing/Diodes-Inc.-AP63357DV-7.pdf?src-supplier=Diodes+Inc+SCT, Country of Origin="Mainland China", Export Control Classification Number (ECCN) Code=EAR99, Harmonized Tariff Schedule (HTS) Code=8542.39.00.60, Height - Seated (Max)=850µm, Introduction Date=2019-08-19, Length=3mm, Lifecycle Status=Production, Manufacturer Part Number=AP63357DV-7, Number of Circuits=1, Number of Terminals=9, Pricing="1=0.86, 10=0.612, 50=0.552, 100=0.485, 1000=0.41, 10000=0.403 (USD)", REACH SVHC=Yes, RoHS=Compliant, Stock=32903, Supplier=Mouser, Terminal Pitch=450µm, Topology=Buck, Width=2mm
U2: "1.5-A boost, buck, inverting switching regulator, operation from -40°C to 85°C 8-SOIC -40 to 85", Case/Package=SOIC, Manufacturer="Texas Instruments", Manufacturer Lifecycle Status=ACTIVE, Max Operating Temperature=85°C, Max Output current=750mA, Max Output Voltage=40V, Min Input Voltage=3V, Min Operating Temperature=-40°C, Min Output Voltage=1.25V, Output Current=1.5A, Quiescent Current=4mA, Supplier Part Number=296-17763-1-ND, Switching Frequency=100kHz, Category="Voltage Regulators - Switching", ComponentLink1Description=https://octopart.com:443/opatz8j6/c1?t=vRUIAOtUKQQXvKqlrexfz4d8y8SFcyA-_XtbYegMgY-IuIHpQagvyubSixvLCS_JDfIKt_x49E7oZRWRd2BYWVXw9riueRxdDMFAsJXXPSqOaGP_nMLA8edQwSNTnMdmR1QsnAu_2HxxO1rwpalXz5NHB4arOO7zP6RfKxWUVDNQ7aNY3RcHgLh8TPXRHc2v_TLvNv-KiSbEAIFDeTYUuYJBqwNy3sQmWDm06T9xZhirujnXW-71LBNlB35zEcw1f5jl7Jwf5Aatpw8_Y0XlWi65mimBgoqKr7BJn1UODlk-uLR8ncNtZqIX6iRmA18OAad3m3uXmi8PXYahMMydeUxFiCmjmLIy7NAXwyodWvx5H3_ir9o9F0TP9Dp4ezsZFjQt&src-supplier=Texas+Instruments, ComponentLink1URL=https://octopart.com:443/opatz8j6/c1?t=vRUIAOtUKQQXvKqlrexfz4d8y8SFcyA-_XtbYegMgY-IuIHpQagvyubSixvLCS_JDfIKt_x49E7oZRWRd2BYWVXw9riueRxdDMFAsJXXPSqOaGP_nMLA8edQwSNTnMdmR1QsnAu_2HxxO1rwpalXz5NHB4arOO7zP6RfKxWUVDNQ7aNY3RcHgLh8TPXRHc2v_TLvNv-KiSbEAIFDeTYUuYJBqwNy3sQmWDm06T9xZhirujnXW-71LBNlB35zEcw1f5jl7Jwf5Aatpw8_Y0XlWi65mimBgoqKr7BJn1UODlk-uLR8ncNtZqIX6iRmA18OAad3m3uXmi8PXYahMMydeUxFiCmjmLIy7NAXwyodWvx5H3_ir9o9F0TP9Dp4ezsZFjQt&src-supplier=Texas+Instruments, ComponentLink2Description=https://datasheet.octopart.com:443/MC33063ADR-Texas-Instruments-datasheet-10254267.pdf?src-supplier=Texas+Instruments, ComponentLink2URL=https://datasheet.octopart.com:443/MC33063ADR-Texas-Instruments-datasheet-10254267.pdf?src-supplier=Texas+Instruments, ComponentLink3Description=https://sigma.octopart.com:443/49249642/technical_drawing/Texas-Instruments-MC33063ADR.pdf?src-supplier=Texas+Instruments, ComponentLink3URL=https://sigma.octopart.com:443/49249642/technical_drawing/Texas-Instruments-MC33063ADR.pdf?src-supplier=Texas+Instruments, ComponentLink4Description=https://datasheet.octopart.com:443/MC33063ADR-Texas-Instruments-datasheet-149239.pdf?src-supplier=Texas+Instruments, ComponentLink4URL=https://datasheet.octopart.com:443/MC33063ADR-Texas-Instruments-datasheet-149239.pdf?src-supplier=Texas+Instruments, ComponentLink5Description=https://datasheet.octopart.com:443/MC33063ADR-Texas-Instruments-datasheet-149238.pdf?src-supplier=Texas+Instruments, ComponentLink5URL=https://datasheet.octopart.com:443/MC33063ADR-Texas-Instruments-datasheet-149238.pdf?src-supplier=Texas+Instruments, ComponentLink6Description=https://datasheet.octopart.com:443/MC33063ADR-Texas-Instruments-datasheet-149237.pdf?src-supplier=Texas+Instruments, ComponentLink6URL=https://datasheet.octopart.com:443/MC33063ADR-Texas-Instruments-datasheet-149237.pdf?src-supplier=Texas+Instruments, ComponentLink7Description=https://datasheet.octopart.com:443/MC33063ADR-Texas-Instruments-datasheet-149241.pdf?src-supplier=Texas+Instruments, ComponentLink7URL=https://datasheet.octopart.com:443/MC33063ADR-Texas-Instruments-datasheet-149241.pdf?src-supplier=Texas+Instruments, ComponentLink8Description=https://datasheet.octopart.com:443/MC33063ADR-Texas-Instruments-datasheet-149240.pdf?src-supplier=Texas+Instruments, ComponentLink8URL=https://datasheet.octopart.com:443/MC33063ADR-Texas-Instruments-datasheet-149240.pdf?src-supplier=Texas+Instruments, ComponentLink9Description=https://datasheet.octopart.com:443/MC33063ADR-Texas-Instruments-datasheet-81639027.pdf?src-supplier=Farnell, ComponentLink9URL=https://datasheet.octopart.com:443/MC33063ADR-Texas-Instruments-datasheet-81639027.pdf?src-supplier=Farnell, ComponentLink10Description=https://datasheet.octopart.com:443/MC33063ADR-Texas-Instruments-datasheet-37140769.pdf?src-supplier=Farnell, ComponentLink10URL=https://datasheet.octopart.com:443/MC33063ADR-Texas-Instruments-datasheet-37140769.pdf?src-supplier=Farnell, ComponentLink11Description=https://datasheet.octopart.com:443/MC33063ADR-Texas-Instruments-datasheet-12606816.pdf?src-supplier=Farnell, ComponentLink11URL=https://datasheet.octopart.com:443/MC33063ADR-Texas-Instruments-datasheet-12606816.pdf?src-supplier=Farnell, ComponentLink12Description=https://datasheet.octopart.com:443/MC33063ADR-Texas-Instruments-datasheet-33038661.pdf?src-supplier=element14+APAC, ComponentLink12URL=https://datasheet.octopart.com:443/MC33063ADR-Texas-Instruments-datasheet-33038661.pdf?src-supplier=element14+APAC, ComponentLink13Description=https://datasheet.octopart.com:443/MC33063ADR.-Texas-Instruments-datasheet-65572232.pdf?src-supplier=element14+APAC, ComponentLink13URL=https://datasheet.octopart.com:443/MC33063ADR.-Texas-Instruments-datasheet-65572232.pdf?src-supplier=element14+APAC, ComponentLink14Description=https://datasheet.octopart.com:443/MC33063ADR.-Texas-Instruments-datasheet-58444985.pdf?src-supplier=element14+APAC, ComponentLink14URL=https://datasheet.octopart.com:443/MC33063ADR.-Texas-Instruments-datasheet-58444985.pdf?src-supplier=element14+APAC, ComponentLink15Description=https://datasheet.octopart.com:443/MC33063ADR-Texas-Instruments-datasheet-23714746.pdf?src-supplier=Newark, ComponentLink15URL=https://datasheet.octopart.com:443/MC33063ADR-Texas-Instruments-datasheet-23714746.pdf?src-supplier=Newark, ComponentLink16Description=https://datasheet.octopart.com:443/MC33063ADR-Texas-Instruments-datasheet-12052.pdf?src-supplier=Newark, ComponentLink16URL=https://datasheet.octopart.com:443/MC33063ADR-Texas-Instruments-datasheet-12052.pdf?src-supplier=Newark, ComponentLink17Description=https://datasheet.octopart.com:443/MC33063ADR-Texas-Instruments-datasheet-159115500.pdf?src-supplier=LCSC, ComponentLink17URL=https://datasheet.octopart.com:443/MC33063ADR-Texas-Instruments-datasheet-159115500.pdf?src-supplier=LCSC, ComponentLink18Description=https://datasheet.octopart.com:443/MC33063ADR-Texas-Instruments-datasheet-137316104.pdf?src-supplier=Future+Electronics, ComponentLink18URL=https://datasheet.octopart.com:443/MC33063ADR-Texas-Instruments-datasheet-137316104.pdf?src-supplier=Future+Electronics, ComponentLink19Description=https://datasheet.octopart.com:443/MC33063ADR-Texas-Instruments-datasheet-11768196.pdf?src-supplier=Arrow+Electronics, ComponentLink19URL=https://datasheet.octopart.com:443/MC33063ADR-Texas-Instruments-datasheet-11768196.pdf?src-supplier=Arrow+Electronics, ComponentLink20Description=https://datasheet.octopart.com:443/MC33063ADR-Texas-Instruments-datasheet-8883959.pdf?src-supplier=element14, ComponentLink20URL=https://datasheet.octopart.com:443/MC33063ADR-Texas-Instruments-datasheet-8883959.pdf?src-supplier=element14, ComponentLink21Description=https://datasheet.octopart.com:443/MC33063ADR-Texas-Instruments-datasheet-137654.pdf?src-supplier=DigiKey, ComponentLink21URL=https://datasheet.octopart.com:443/MC33063ADR-Texas-Instruments-datasheet-137654.pdf?src-supplier=DigiKey, ComponentLink22Description=https://datasheet.octopart.com:443/MC33063ADR-Texas-Instruments-datasheet-14045796.pdf?src-supplier=iiiC, ComponentLink22URL=https://datasheet.octopart.com:443/MC33063ADR-Texas-Instruments-datasheet-14045796.pdf?src-supplier=iiiC, ComponentLink23Description=http://sigma.octopart.com:80/conflict_mineral_statement/Texas-Instruments-company-63.pdf?src-supplier=Compliance+Statements, ComponentLink23URL=http://sigma.octopart.com:80/conflict_mineral_statement/Texas-Instruments-company-63.pdf?src-supplier=Compliance+Statements, ComponentLink24Description=http://sigma.octopart.com:80/reach_statement/Texas-Instruments-company-64.pdf?src-supplier=Compliance+Statements, ComponentLink24URL=http://sigma.octopart.com:80/reach_statement/Texas-Instruments-company-64.pdf?src-supplier=Compliance+Statements, Contact Plating=Gold, Height=1.75mm, Lead Free="Lead Free", Length=4.9mm, Lifecycle Status=Production, Manufacturer Part Number=MC33063ADR, Max Supply Voltage=40V, Number of Channels=1, Number of Outputs=1, Output Type=Adjustable, Output Voltage=1.25V, Packaging="Cut Tape", Pins=8, Pricing="1=0.7, 10=0.499, 25=0.4484, 100=0.3924, 250=0.36564, 500=0.3495, 1000=0.33623 (USD)", REACH SVHC=No, RoHS=Compliant, Schedule B="8542390000, 8542390000|8542390000|8542390000|8542390000|8542390000", Stock=28348, Supplier=DigiKey, Synchronous Rectifier=No, Termination=SMD/SMT, Thickness=1.58mm, Topology="Boost, Buck, Flyback, SEPIC", Weight=72.603129mg, Width=3.91mm

## Free pads (board coordinates)
  round 151.18 hole 151.18: MH(1160,1150) MH(1160,4850) MH(3140,1150) MH(3140,4850)

## Via types
v1: diameter 50, hole 28, Top Layer 1 to Bottom Layer 1, 20 vias

## Nets (pads, with @x,y where several pads share a name; then routed paths per layer and width w, separated by ;. In a path a pad name is that pad's centre, name@x,y a point inside that pad or via, vN(x,y) a via of type N, cw(c..) or ccw(c..) an arc to the next point about the centre after c; other vN are vias at no path point)
+5V: "Arduino Conn.1" "PI Conn.1" C2.2 C4.2 L1.2 R1.2 | length 893.2
  Top Layer 1 w30: R1.2@2377.57,3897.87 2377.57,3990.43
  Top Layer 1 w50: 2377.57,3990.43 2377.57,4009.5
  Top Layer 1 w55: v1(2280,4530) 2280,4330.83 L1.2 ; 2377.57,4009.5 2377.57,4052.9 2323.6,4106.87 2322.58,4106.87 2320.46,4108.98 C4.2 2320.46,4184.54 2300,4205 2285,4205 2274.17,4215.83 L1.2 ; C2.2 2477.98,4326.47 2476.52,4325 L1.2
+12V: "Fan Conn.1" "Microcontroller Conn.1" Co.1 Cop.1 D1.A R3.2 | length 1181.3
  Top Layer 1 w25: D1.A 1455.36,2640 1470,2625.36 1470,2580 1500,2550 v1(1580,2550) 1720,2550 1780,2610 1780,3030 1728.43,3081.57 R3.2
GND: "Arduino Conn.2" "Battery Conn.2" "Fan Conn.2" "Inverter Conn.2" "Microcontroller Conn.2" "PI Conn.2" C1.2 C2.1 C5.N C5in.N Co.2 Cop.2 CT.1 Q1.3 R2.1 R6.1 U1.4 U1.5 U1.8 U2.4 | length 2221.2
  Top Layer 1 w15: U2.4 U2.4@1398.33,2960 ; v1(1980,3940) 1980,3810 1991.47,3798.53 C1.2
  Top Layer 1 w20: U2.4@1398.33,2960 v1(1480,2960) ; CT.1 1460,2830 1480,2850 v1(1480,2960) ; R6.1 1690,2910 1640,2960 v1(1480,2960) ; R2.1 2465,3805 2480,3820 v1(2480,4010) C2.1
  Bottom Layer 1 w10: 2063.7,3983.7 U1.5 ; 2188.46,3958.46 U1.4
  Bottom Layer 1 w15: 2063.7,3980 2033.7,3950 ; U1.8 2049.53,4060.47 2040,4070 1970,4070 1950,4050 1950,3968.79 1978.79,3940 v1(1980,3940) 2023.7,3940 2033.7,3950 ; 2188.46,3958.46 2180,3950 2033.7,3950
  Bottom Layer 1 w20: v1(1480,2960) 1480.28,2960.28 1615.71,2960.28 Q1.3
  other v1: 1620,1360 1180,1370 1180,1550 1620,1550 2210,1700 2110,3490
NetC2_2: 
NetC3_1: C3.1 L1.1 U1.9 | length 501
  Top Layer 1 w30: C3.1 2137.43,4115 2155,4132.57 v1(2155,4205)
  Top Layer 1 w40: L1.1 L1.1@2050,4320.83
  Top Layer 1 w55: L1.1@2050,4320.83 2050,4240 2083.09,4206.91 v1@2153.09,4206.91
  Bottom Layer 1 w15: U1.9@2155.47,4065 2155.47,4119.53
  Bottom Layer 1 w25: 2155,4120 2155.47,4119.53
  Bottom Layer 1 w30: 2155,4120 2155,4170
  Bottom Layer 1 w55: 2155,4170 v1(2155,4205)
NetC3_2: C3.2 U1.6 | length 218.5
  Top Layer 1 w15: v1@2003.8,4021.2 C3.2@2003.8,4113.8
  Top Layer 1 w30: C3.2 C3.2@2003.8,4113.8
  Bottom Layer 1 w10: v1(2005,4020) 2015.82,4020 2034.41,4001.42 U1.6
NetC4_1: C4.1 R1.1 R2.2 U1.3 | length 461.4
  Top Layer 1 w10: C4.1 2249.54,4040.46 2270,4020 v1(2270,3970) 2270,3941.7 R1.1 2313.83,3855.86 2307.97,3850 2280,3850 2270,3840 2270,3806.57 R2.2
  Bottom Layer 1 w10: U1.3 2238.58,4001.42 v1(2270,3970)
NetCo_1: 
NetCT_2: CT.2 U2.3 | length 126.8
  Top Layer 1 w15: CT.2 1345,2830.46 U2.3
NetD1_1: D1.K L2.2 Q1.2 Q1.4 U2.1 | length 1737.6
  Top Layer 1 w15: L2.2 L2.2@1230,2092.17 ; 1240,2380 1241.26,2381.26 ; D1.K D1.K@1245,2643.74
  Top Layer 1 w20: D1.K@1245,2643.74 U2.1
  Top Layer 1 w25: L2.2@1230,2092.17 1230,2360 1240,2370 1240,2380 ; 1241.26,2381.26 1241.26,2500 ; D1.K 1241.26,2500 ; v1(1320,2500) 1241.26,2500
  Bottom Layer 1 w25: v1(1320,2500) 1320,2650 1540,2870 Q1.2 Q1.4
NetL2: 
NetL2_1: L2.1 R5.1 Rsc.2 U2.7 | length 2029.1
  Top Layer 1 w20: Rsc.2 1256.95,3366.95 1256.95,3263.05 v1(1260,3260) 1295,3225 U2.7
  Top Layer 1 w25: v1(1410,2500) 1410,2230 1550,2090 L2.1
  Bottom Layer 1 w25: v1(1260,3260) 1318.42,3201.58 R5.1 1320,2888.42 1320,2770 1240,2690 1240,2470 1270,2440 1350,2440 v1(1410,2500)
NetQ1_1: Q1.1 R6.2 U2.2 | length 827.3
  Top Layer 1 w20: 1290,2771.72 1290,2880 1295,2885 U2.2
  Top Layer 1 w25: 1290,2771.72 1301.72,2760 1490,2760 1515.22,2734.78 1515.22,2694.78 v1(1520,2690) 1522.5,2692.5 1582.5,2692.5 1601.57,2711.57 R6.2
  Bottom Layer 1 w20: v1(1520,2690) 1520,2760 1539.45,2779.45 Q1.1
NetR3_1: R3.1 U2.5 | length 117
  Top Layer 1 w15: R3.1@1505.08,3163.35 R3.1
  Top Layer 1 w20: U2.5 R3.1@1505.08,3163.35
NetR5_2: R5.2 U2.8 | length 426.8
  Top Layer 1 w20: v1(1160,3160) 1244.17,3160 1245,3160.83 U2.8
  Bottom Layer 1 w25: v1(1160,3160) 1220,3160 1241.58,3138.42 R5.2
Vin: "Battery Conn.1" "Inverter Conn.1" C1.1 C5.P C5in.P Rsc.1 U1.1 U1.2 U2.6 | length 1068.7
  Top Layer 1 w20: U2.6 1345,3275
  Top Layer 1 w25: 1345,3275 1366.1,3296.1 Rsc.1 C5.P
  Top Layer 1 w40: 2141.47,3871.47 2198.53,3871.47 v1(2200,3870)
  Top Layer 1 w50: C1.1 2141.47,3871.47
  Bottom Layer 1 w10: U1.2 2189.33,4020 2210,4020 2220,4030 2220,4040 2230.47,4050.47 2230.47,4060.47
  Bottom Layer 1 w30: U1.1 2230.47,4060.47 2299.53,4060.47 ; v1(2200,3870) 2270,3870 2310,3910
  Bottom Layer 1 w40: 2299.53,4060.47 2330,4030 ; 2310,3910 2330,3930
  Bottom Layer 1 w55: 2330,3930 2330,4030
pads on no net: U1.7

## Polygon pours and split planes (outlines as drawn)
+5V on PWR (split plane): 3279.9,4745.07 3096.24,4745.07 3035.07,4806.24 3035.07,4979.9 3279.9,4979.9